# Altium PCB BARC_circuitry.PcbDoc
Units mm, origin at the board's own origin, x right, y up, seen from the top; angles counter-clockwise.
Board outline 64 x 51 mm, 2 copper layers (Top Layer, Bottom Layer); 14 components, 16 nets, 90 pads, 0 vias.
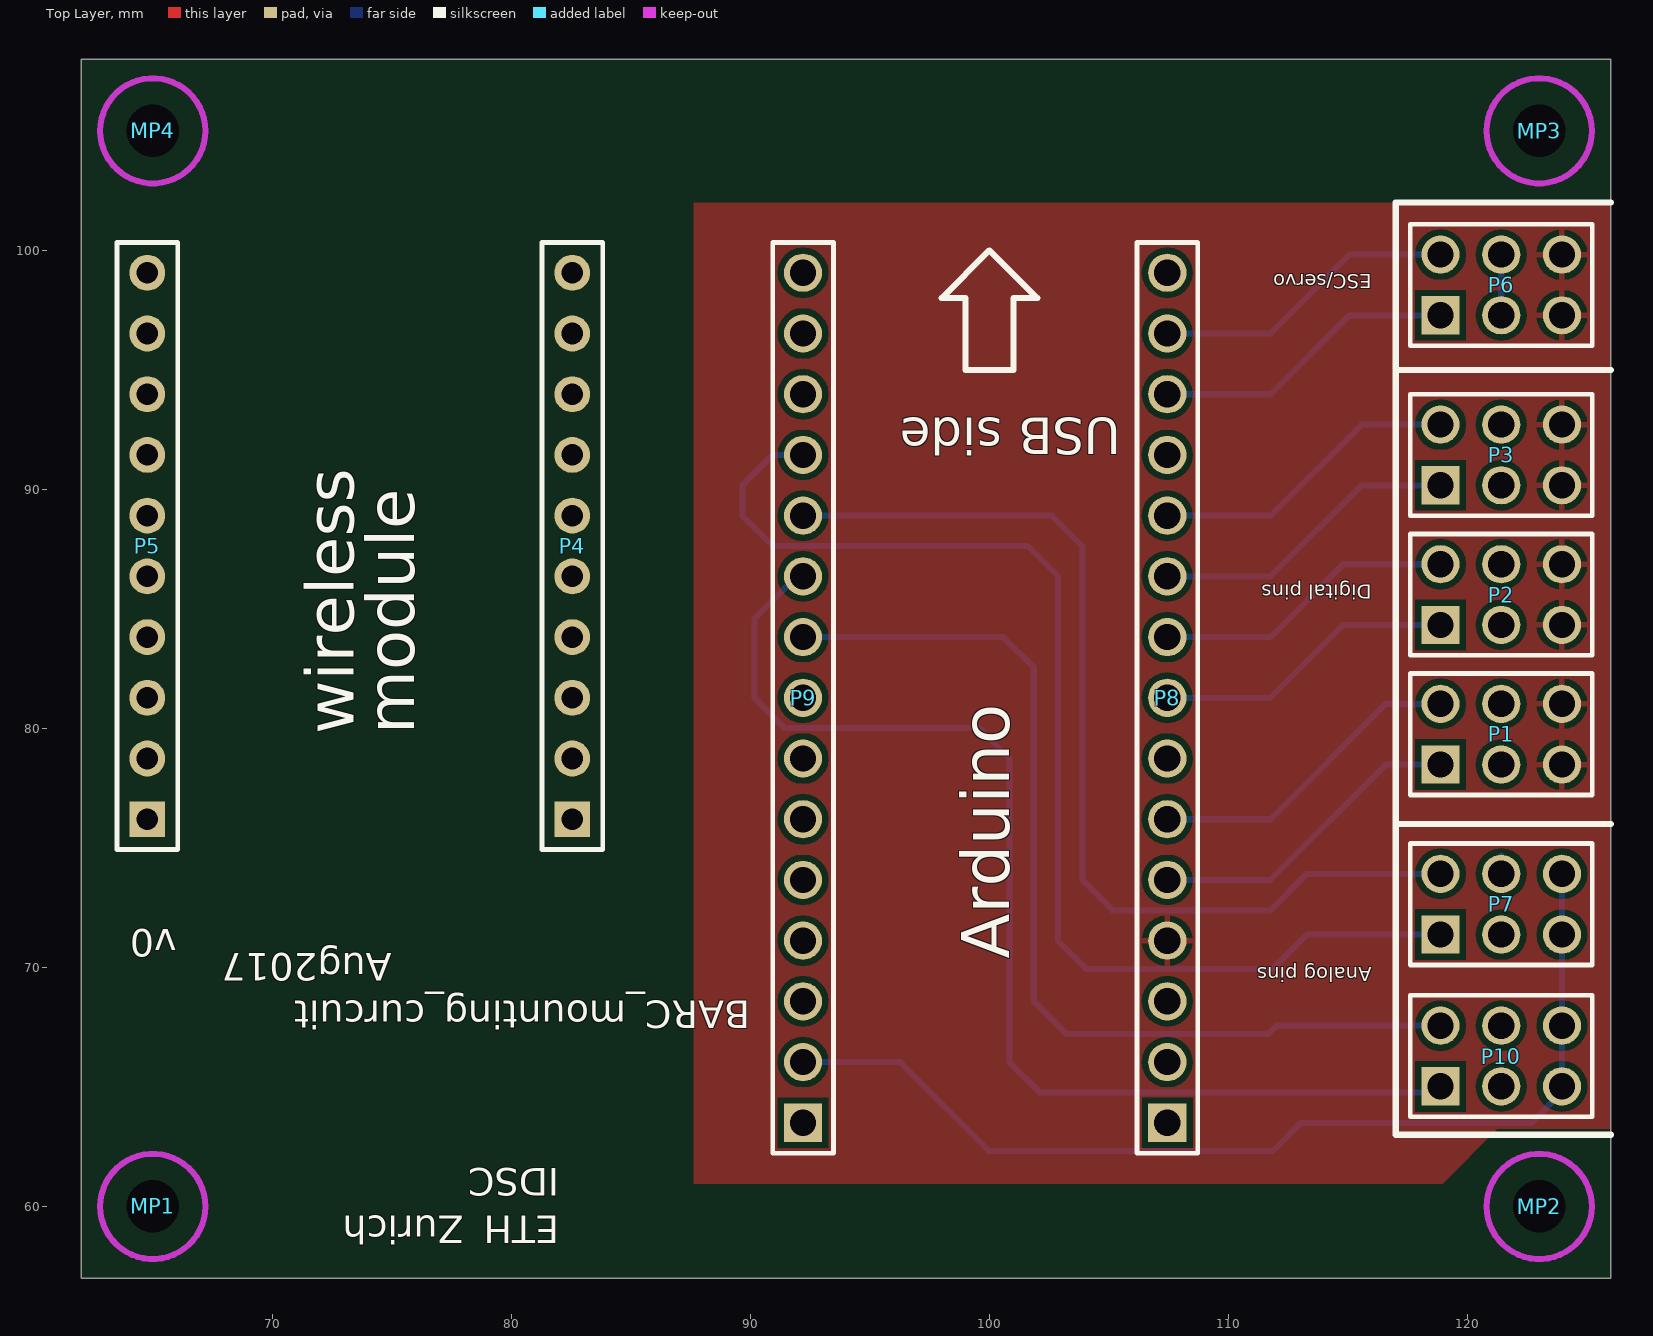
[diagram p0: Top Layer view]
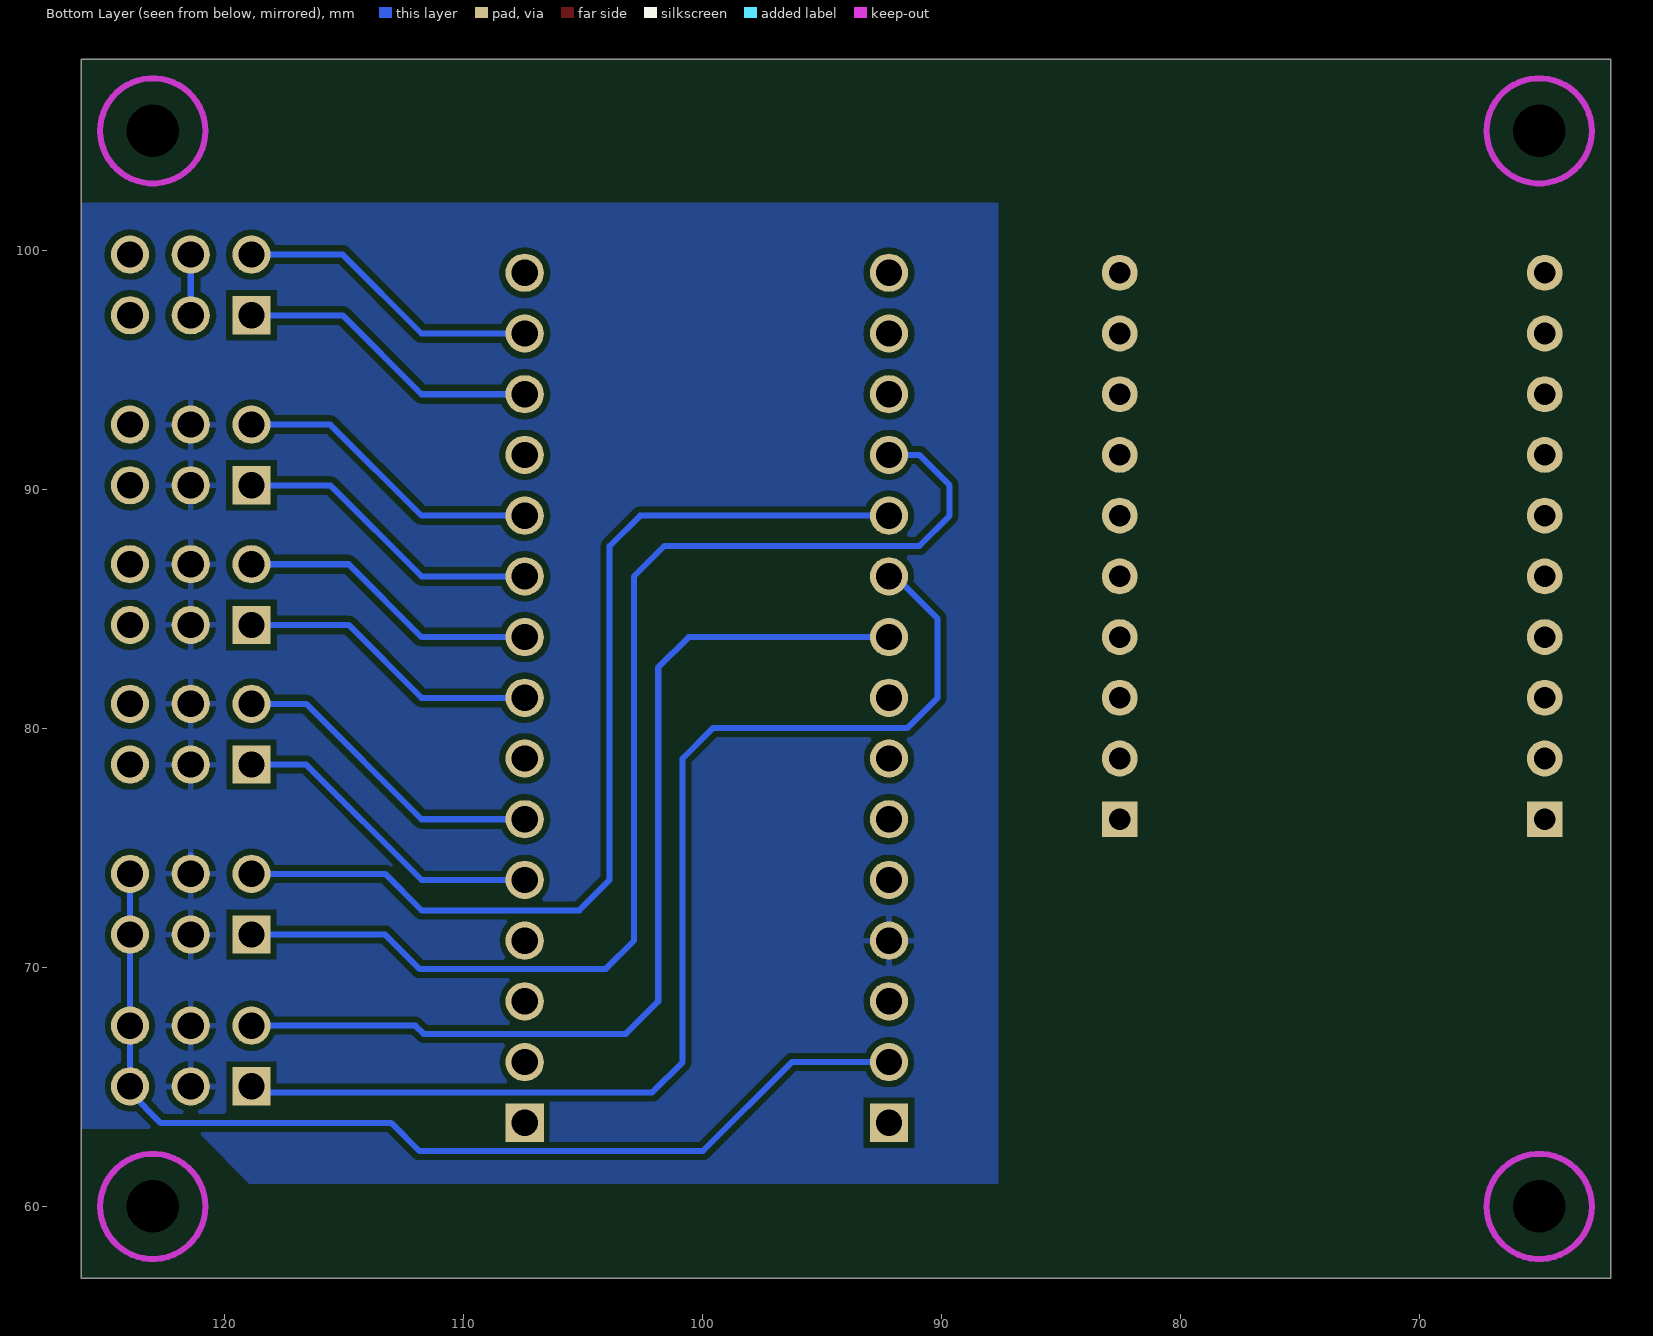
[diagram p1: Bottom Layer view, seen from below]
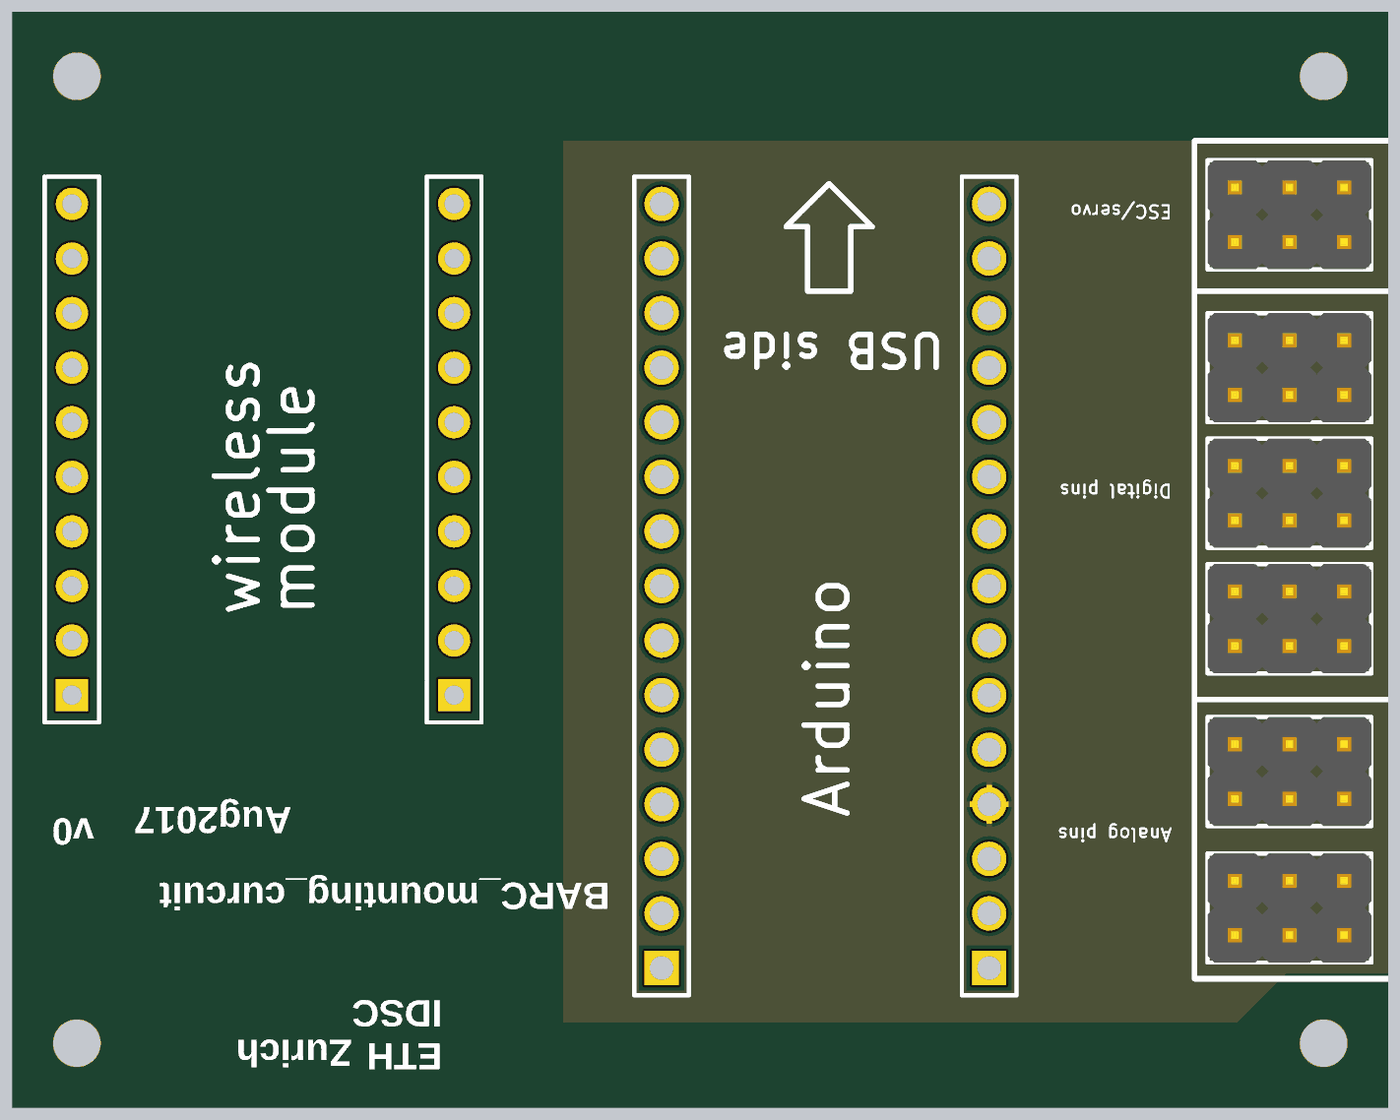
[diagram p2: 3D render of the assembled board from above, using the file's embedded part models]

## Layer stack, top to bottom
Top Solder: solder mask 0.0102, Solder Resist, Dk 3.5
Top Layer: signal copper 0.0356
Dielectric 1: dielectric 0.32, FR-4, Dk 4.8
Bottom Layer: signal copper 0.0356
Bottom Solder: solder mask 0.0102, Solder Resist, Dk 3.5

## Board outline
62,57 62,108 126,108 126,57

## Design rules (kind name [scope] priority, off if disabled: settings)
Clearance [All] p1: gap=0.254 ignorepadtopadclearanceinfootprint=FALSE except(0: Arc-Hole Track-Hole SMDPad-Hole THPad-Hole Via-Hole Fill-Hole Poly-Hole Region-Hole Text-Hole)
PolygonConnect [All] p1: connectstyle=Relief reliefconductorwidth=0.254 reliefentries=4 polygonreliefangle="90 Angle" airgapwidth=0.254
RoutingVias [All] p1: holewidth=0.711 width=1.27 viastyle="Through Hole" minholewidth=0.711 minwidth=1.27 maxholewidth=0.711 maxwidth=1.27
SolderMaskExpansion [All] p1: expansion=0.102
Width [All] p1: maxlimit=0.254 minlimit=0.254 preferedwidth=0.254
30 further rules are at their usual default settings.

## Components (designator, comment, footprint, x,y, rotation, side; value= is the part's Value field where it differs from the comment)
MP1 "Mounting hole M2" mh_m2 65,60 r0 top
MP2 "Mounting hole M2" mh_m2 123,60 r0 top
MP3 "Mounting hole M2" mh_m2 123,105 r0 top
MP4 "Mounting hole M2" mh_m2 65,105 r0 top
P1 "Header 3X2" HDR2X3 118.872,78.486 r0 top
P2 "Header 3X2" HDR2X3 118.872,84.328 r0 top
P3 "Header 3X2" HDR2X3 118.872,90.17 r0 top
P4 "Header 10" HDR1X10 82.55,76.2 r90 top
P5 "Header 10" HDR1X10 64.77,76.2 r90 top
P6 "Header 3X2" HDR2X3 118.872,97.282 r0 top
P7 "Header 3X2" HDR2X3 118.872,71.374 r0 top
P8 "10" HDR1X15 107.442,63.5 r90 top
P9 "10" HDR1X15 92.202,63.5 r90 top
P10 "Header 3X2" HDR2X3 118.872,65.024 r0 top

## Footprints (in the part's own frame and the unit in brackets; to place one, negate y for a bottom-side part, rotate by r counter-clockwise, add the part's x,y. Pads: shape width x height; smd on the part's side, far side on the other; paste and mask are expansions set on the pad)
HDR1X10 [mm] "Connector; Header; 10 Position"
  rect 1.5x1.5 hole 0.9: 1(0,0)
  round 1.5 hole 0.9: 2(2.54,0) 3(5.08,0) 4(7.62,0) 5(10.16,0) 6(12.7,0) 7(15.24,0) 8(17.78,0) 9(20.32,0) 10(22.86,0)
  silkscreen extent -1.27,-1.27 24.13,1.27
HDR1X15 [mm] "Connector; Header; 15 Position"
  rect 1.6x1.6 hole 1.1: 1(0,0)
  round 1.6 hole 1.1: 2(2.54,0) 3(5.08,0) 4(7.62,0) 5(10.16,0) 6(12.7,0) 7(15.24,0) 8(17.78,0) 9(20.32,0) 10(22.86,0) 11(25.4,0) 12(27.94,0) 13(30.48,0) 14(33.02,0) 15(35.56,0)
  silkscreen extent -1.27,-1.27 36.83,1.27
HDR2X3 [mm] "Connector; Header; 3x2 Position"
  rect 1.6x1.6 hole 1.1: 1(0,0)
  round 1.6 hole 1.1: 2(0,2.54) 3(2.54,0) 4(2.54,2.54) 5(5.08,0) 6(5.08,2.54)
  silkscreen extent -1.27,-1.27 6.35,3.81, body extent -1.27,-1.27 6.35,3.81, height 10.3
mh_m2 [mil]
  round 60 hole 86.61: screw(0,0)
  Keep-Out Layer circle w10: c0,0 r86.61

## Part data
MP1 MP2 MP3 MP4: "Hole for M2 srews"
P1 P2 P3 P6 P7 P10: "Header, 3-Pin, Dual row"
P4 P5: "Header, 10-Pin", LatestRevisionDate=17-Jul-2002, LatestRevisionNote="Re-released for DXP Platform.", Publisher="Altium Limited"
P8 P9: library part "Header 15", "Header, 15-Pin"

## Nets (pads, with @x,y where several pads share a name; then routed paths per layer and width w, separated by ;. In a path a pad name is that pad's centre, name@x,y a point inside that pad or via, vN(x,y) a via of type N, cw(c..) or ccw(c..) an arc to the next point about the centre after c; other vN are vias at no path point)
NetP1_1: P1.1 P8.5 | length 13.4
  Bottom Layer w0.254: P8.5 111.76,73.66 116.586,78.486 P1.1
NetP1_2: P1.2 P8.6 | length 13.4
  Bottom Layer w0.254: P8.6 111.76,76.2 116.586,81.026 P1.2
NetP1_3: P1.3 P1.4 P2.3 P2.4 P3.3 P3.4 P7.3 P7.4 P9.4 P10.3 P10.4 | length 0.8
  Bottom Layer w0.254: P7.4 P7.4@121.412,74.676
NetP1_5: P1.5 P1.6 P2.5 P2.6 P3.5 P3.6 P6.5 P6.6 P8.4
NetP2_1: P2.1 P8.8 | length 13.1
  Bottom Layer w0.254: P8.8 111.76,81.28 114.808,84.328 P2.1 ; P2.1@118.618,84.582 P2.1@118.872,84.836
NetP2_2: P2.2 P8.9 | length 13.1
  Bottom Layer w0.254: P8.9 111.76,83.82 114.808,86.868 P2.2 ; P2.2@118.618,87.122 P2.2@118.872,87.376
NetP3_1: P3.1 P8.10 | length 13
  Bottom Layer w0.254: P8.10 111.76,86.36 115.57,90.17 P3.1
NetP3_2: P3.2 P8.11 | length 13
  Bottom Layer w0.254: P8.11 111.76,88.9 115.57,92.71 P3.2
NetP6_1: P6.1 P8.13 | length 12.8
  Bottom Layer w0.254: P8.13 111.76,93.98 115.062,97.282 P6.1
NetP6_2: P6.2 P8.14 | length 12.8
  Bottom Layer w0.254: P8.14 111.76,96.52 115.062,99.822 P6.2
NetP6_3: P6.3 P6.4 | length 2.5
  Bottom Layer w0.254: P6.3@121.412,96.774 P6.3 P6.4@121.412,99.314
NetP7_1: P7.1 P9.12 | length 50.9
  Bottom Layer w0.254: P9.12 90.932,91.44 89.662,90.17 89.662,88.9 90.932,87.63 101.6,87.63 102.87,86.36 102.87,71.12 104.051,69.939 111.849,69.939 113.284,71.374 P7.1
NetP7_2: P7.2 P9.11 | length 42.3
  Bottom Layer w0.254: P9.11 102.616,88.9 103.886,87.63 103.886,73.66 105.156,72.39 111.76,72.39 113.284,73.914 P7.2
NetP7_5: P7.5 P7.6 P9.2 P10.5 P10.6 | length 43.5
  Bottom Layer w0.254: P9.2 96.266,66.04 99.987,62.319 111.849,62.319 113.03,63.5 122.682,63.5 123.952,64.77 P10.5 P10.6 P7.5 P7.6
NetP9_9: P9.9 P10.2 | length 41.9
  Bottom Layer w0.254: P9.9 100.584,83.82 101.854,82.55 101.854,68.58 103.213,67.221 111.671,67.221 112.014,67.564 P10.2
NetP9_10: P9.10 P10.1 | length 49.3
  Bottom Layer w0.254: P9.10 91.948,86.36 90.17,84.582 90.17,81.28 91.44,80.01 99.568,80.01 100.838,78.74 100.838,66.04 102.108,64.77 118.872,64.77 P10.1
pads on no net: MP1.screw MP2.screw MP3.screw MP4.screw P4.1 P4.2 P4.3 P4.4 P4.5 P4.6 P4.7 P4.8 P4.9 P4.10 P5.1 P5.2 P5.3 P5.4 P5.5 P5.6 P5.7 P5.8 P5.9 P5.10 P8.1 P8.2 P8.3 P8.7 P8.12 P8.15 P9.1 P9.3 P9.5 P9.6 P9.7 P9.8 P9.13 P9.14 P9.15

## Polygon pours and split planes (outlines as drawn)
NetP1_5 on Top Layer "NETP1_5_L01_P008" (solid, remove dead copper, pour order 8): 87.63,102 126,102 126,63.246 121.246,63.246 118.96,60.96 87.63,60.96
NetP1_3 on Bottom Layer "NETP1_3_L02_P006" (solid, remove dead copper, pour order 6): 87.63,102 126,102 126,63.246 121.246,63.246 118.96,60.96 87.63,60.96

## Silkscreen, mask and mechanical layers (free items; w line width, h text height)
Top Overlay:
  lines w0.254: 126,63 117,63 117,76 ; 126,76 125,76 117,76 ; 126,95 117,95 ; 126,102 117,102 117,95 ; 100,100 98,98 99,98 99,95 101,95 101,98 102,98 100,100 ; 100,100 100,100 ; 117,76 117,95
  text "ESC/servo" at 116,99 h0.6 r180
  text "USB side" at 105.5,93 h1.52 r180
  text "Digital pins" at 116,86 h0.6 r180
  text "wireless" at 73.406,79.756 h2 r90
  text "module" at 75.946,79.756 h2 r90
  text "v0" at 66,72 h2 r180
  text "Aug2017" at 75,71 h2 r180
  text "Arduino" at 100.838,70.358 h2 r90
  text "Analog pins" at 116,70 h0.6 r180
  text "BARC_mounting_curcuit" at 90,69 h2 r180
  text "IDSC" at 82,62 h2 r180
  text "Zurich" at 78,60 h2 r180
  text "ETH" at 82,60 h2 r180
Mechanical 1:
  the board outline again, w0.254